# EAGLE board cg2 (EAGLE 4.11)
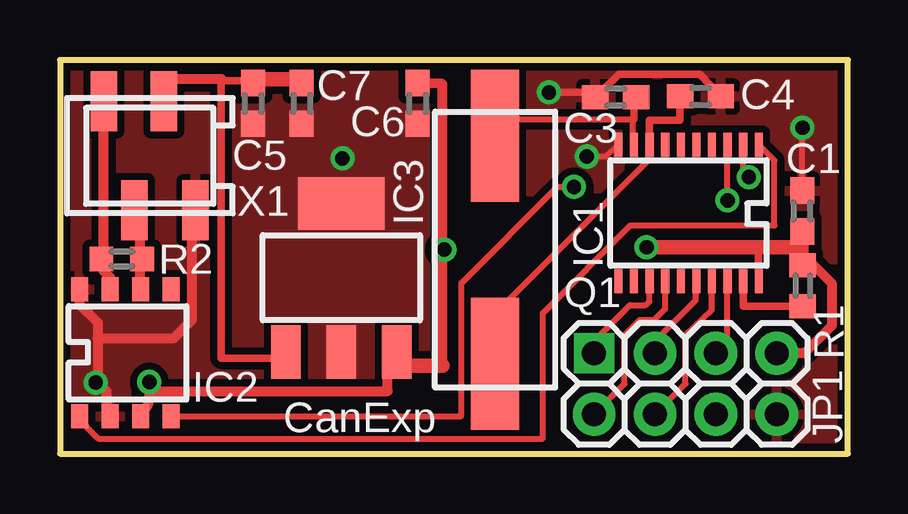
[diagram p0: board, top side]
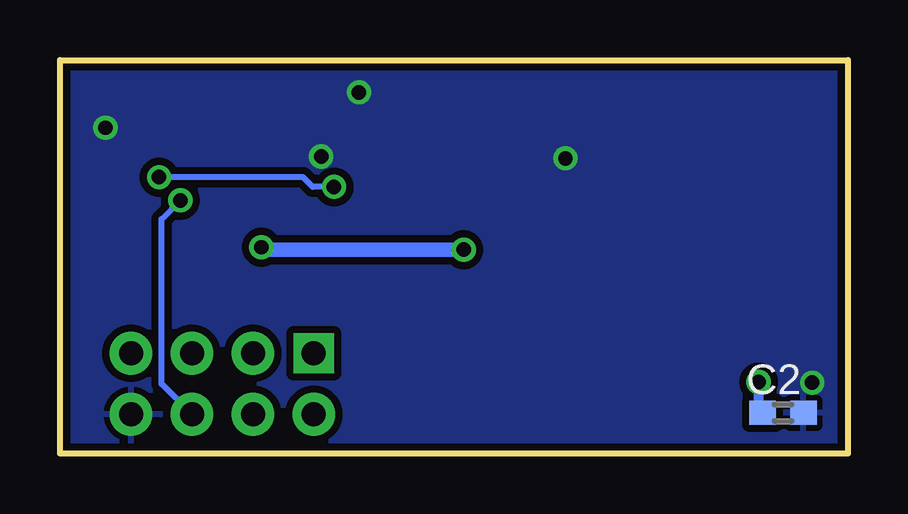
[diagram p1: board, bottom side, seen from below]

Size 32.85 x 16.4 mm. Coordinates in mm from the lower left corner, seen from the top.
Outline: 0,0 32.85,0 32.85,16.4 0,16.4 0,0
Copper layers (1*16): Top 0.035mm / dielectric 1.5mm / Bottom 0.035mm
Design rules "10mils, 0.6drill": minimum track width 10mil, minimum drill 0.6mm, track to track 10mil, track to pad 10mil, pad to pad 10mil, via to via 10mil, smd to smd 10mil, copper to edge 10mil, drill to drill 10mil, minimum pad ring 10mil, minimum via ring 8mil, stop-mask expansion 0mil, vias tented up to drill 0mil, thermal gap 10mil

## Footprints (pad centres in the part's own frame; a part is rotated, then mirrored left to right if it is on the bottom)
C0603 = smd 1.1 x 1: 1 -0.85,0; 2 0.85,0
TSSOP = smd 0.34 x 1: 1 -2.925,-2.85; 2 -2.275,-2.85; 3 -1.625,-2.85; 4 -0.975,-2.85; 5 -0.325,-2.85; 6 0.325,-2.85; 7 0.975,-2.85; 8 1.625,-2.85; 9 2.275,-2.85; 10 2.925,-2.85; 11 2.925,2.85; 12 2.275,2.85; 13 1.625,2.85; 14 0.975,2.85; 15 0.325,2.85; 16 -0.325,2.85; 17 -0.975,2.85; 18 -1.625,2.85; 19 -2.275,2.85; 20 -2.925,2.85
TSSOP' = smd 0.7 x 1: 1 -1.981,-2.645; 2 -0.711,-2.645; 3 0.559,-2.645; 4 1.829,-2.645; 5 1.829,2.645; 6 0.559,2.645; 7 -0.711,2.645; 8 -1.981,2.645
SOT223 = smd 1.219 x 2.235: 1 -2.311,-3.099; 2 0,-3.099; 3 2.311,-3.099 | smd 3.6 x 2.2: 4 0,3.099
2X04 = drill 1 pad 1.676 square: 1 -3.81,1.27 | drill 1 pad 1.778 round: 2 -3.81,-1.27; 3 -1.27,1.27; 4 -1.27,-1.27; 5 1.27,1.27; 6 1.27,-1.27; 7 3.81,1.27; 8 3.81,-1.27
SMD = smd 5.5 x 2: P$1 4.75,0; P$2 -4.75,0
R0603@1 = smd 1 x 1.1: 1 -0.85,0; 2 0.85,0
R0603 = smd 0.991 x 1.016: 1 -0.85,0; 2 0.85,0
MICROMATCH-4-SMD = smd 1.1 x 2.5: 1 1.905,-2.272; 2 0.585,2.272; 3 -0.635,-2.272; 4 -1.905,2.272

## Placement (x,y rotation side)
C1  100n  [C0603]  30.95,10.11 90 top
C2  100n  [C0603]  2.7,1.7 0 bottom
C3  16p  [C0603]  23.17,14.85 180 top
C4  16p  [C0603]  26.7,14.89 0 top
C5  0.22µ  [C0603]  8.04,14.59 270 top
C6  100n  [C0603]  14.9,14.59 270 top
C7  100n  [C0603]  10.07,14.59 270 top
IC1  MCP2515  [TSSOP]  26.21,10.02 180 top
IC2  MCP2551  [TSSOP']  2.8,4.2 0 top
IC3  LM340MP-5.0  [SOT223]  11.73,7.32 0 top
JP1  [2X04]  26.08,2.91 0 top
Q1  16/20MHz  [SMD]  18.14,8.5 270 top
R1  12k  [R0603@1]  30.97,6.99 270 top
R2  [R0603]  2.58,8.12 0 top
X1  MICROMATCH-4  [MICROMATCH-4-SMD]  3.75,12.41 0 top

## Library data of the parts
C1-C7 R1 R2 = rcl
IC1 = mcp2515
IC2 = mcp2551
IC3 = lm340mp
JP1 = pinhead-mm
Q1 = hc49-4h-smx
X1 = micromatch-smd

## Nets
CANH: IC2.7 R2.1 X1.4
CLK: IC1.3 JP1.6
CS: IC1.18 JP1.5
GND: C1.2 C2.2 C3.2 C4.2 C5.2 C6.2 C7.2 IC1.10 IC2.2 IC2.8 IC3.2 IC3.4 JP1.8 X1.1
INT: IC1.13 JP1.1
N$1: IC1.2 IC2.4
N$2: IC1.1 IC2.1
N$3: IC2.6 R2.2 X1.3
N$10: IC1.19 R1.2
N$12: C3.1 IC1.9 Q1.P$2
N$13: C4.1 IC1.8 Q1.P$1
SCK: IC1.14 JP1.2
SI: IC1.16 JP1.3
SO: IC1.17 JP1.4
VCC: C1.1 C2.1 C6.1 IC1.20 IC2.3 IC3.3 JP1.7 R1.1
VCC_ARNE: C5.1 C7.1 IC3.1 X1.2

## Tracks (layer width: path | path; a pad name or v marks a point on that pad's centre or on a via)
CANH
  Top 0.254: R2.1 1.82,8.12
  Top 0.406: IC2.7 2.07,6.86 2.07,7.35 1.82,7.61 1.82,8.12 1.82,14.15 X1.4
CLK  (via drill 0.6)
  Top 0.254: v27.83,10.55 27.83,12.38 IC1.3
  Bottom 0.254: v27.83,10.55 28.62,9.77 28.62,2.91 JP1.6
CS
  Top 0.254: IC1.18 27.83,4.66 JP1.5
GND  (via drill 0.6)
  Top 0.254: v21.96,12.38 22.77,12.38 IC1.10 | v30.95,13.58 30.95,11.44 C1.2 | 1.59,2.96 v1.49,2.96
  Top 0.305: IC2.2 1.95,1.99 | C4.2 26.67,15.81 23.29,15.81 C3.2 22.15,15.05 v20.39,15.05
  Top 0.406: 1.95,1.99 1.95,2.6 1.59,2.96 1.59,4.81 | 1.59,4.81 1.59,5.45 0.83,6.21 IC2.8 | X1.1 5.65,9.24 5.5,9 5.5,5.58 4.74,4.81 1.59,4.81 | 1.59,4.81 1.57,4.81
  Bottom 0.305: v20.39,15.05 20.34,15
  other vias: 11.78,12.3
  pour Bottom (isolate 0.305): -0.01,16.42 32.83,16.42 32.83,-0.03 24.38,-0.03 -0.01,-0.03
  pour Top (isolate 0.305, no thermals): 6.83,15.8 15.77,15.8 15.77,3.12 6.83,3.12
  pour Top (isolate 0.305): 0.04,16.5 33.06,16.5 33.06,-0.14 -0.21,-0.14 -0.21,16.5
INT
  Top 0.254: IC1.13 24.58,7.05 24.58,6.34 24.43,6.19 23.77,6.19 22.27,4.69 JP1.1
N$1  (via drill 0.6)
  Top 0.254: v21.43,11.11 20.74,11.11 16.73,7.1 16.73,1.56 4.94,1.56 IC2.4 | v28.72,11.52 28.49,11.75 IC1.2
  Bottom 0.254: v21.43,11.11 22.32,11.11 22.72,11.52 v28.72,11.52
N$2
  Top 0.254: IC2.1 1.13,1.08 1.59,0.62 20.13,0.62 20.13,5.85 23.79,9.51 29.79,9.51 29.79,12.22 IC1.1
N$3
  Top 0.254: 3.34,8.12 R2.2
  Top 0.406: IC2.6 3.34,6.86 3.34,8.12 3.34,9.14 X1.3 3.09,9.63
N$10
  Top 0.305: IC1.19 28.49,6.14 R1.2
N$12
  Top 0.254: 23.87,13.93 23.87,13.35 IC1.9 | 23.87,13.93 19.14,13.93 Q1.P$2 | 23.87,13.93 23.92,13.93
  Top 0.305: C3.1 23.92,14.63 23.92,13.93
N$13
  Top 0.254: IC1.8 24.53,12.38 24.53,12.23 18.25,5.96 Q1.P$1
  Top 0.305: IC1.8 24.58,13.88 25.85,13.88 C4.1
SCK
  Top 0.254: IC1.14 25.23,7.14 25.19,7.1 25.24,7.05 25.24,6.03 24.78,5.58 24.17,5.58 23.54,4.94 23.54,2.91 | JP1.2 23.54,2.91 | 23.54,2.91 23.55,2.92
SI
  Top 0.254: IC1.16 26.51,7.15 26.51,6.39 24.81,4.69 JP1.3
SO
  Top 0.254: IC1.17 27.18,7.11 27.17,7.1 27.17,5.98 26.08,4.94 26.08,2.91 | JP1.4 26.08,2.91 | 26.08,2.91 26.09,2.92
VCC  (via drill 0.6)
  Top 0.254: IC1.20 | 3.73,2.53 3.78,2.6
  Top 0.305: 13.66,3.37 IC3.3 | IC1.20 29.12,8.59 29.68,8.59
  Top 0.406: C6.1 15.95,15.41 15.95,8.5 | 15.95,3.66 15.95,8.5 | 14.08,3.66 14.08,4.48 IC3.3 | 3.78,2.6 13.66,2.6 13.66,3.37 | IC2.3 3.67,2.04 3.73,2.53 v3.73,2.98 | 15.95,8.5 v16.02,8.5 | 29.68,8.6 29.68,8.59 | 30.9,7.99 31.28,7.99 32.17,7.1 32.17,5.32 31.03,4.18 JP1.7
  Top 0.61: 14.08,3.66 15.95,3.66 | v24.45,8.6 29.68,8.6 | C1.1 30.9,9.26 30.9,8.59 | 29.68,8.59 30.9,8.59 | R1.1 30.9,7.84 30.9,7.99 30.9,8.59
  Bottom 0.254: C2.1 3.73,2.2
  Bottom 0.406: 3.73,2.2 v3.73,2.98 | 24.3,8.5 24.3,8.6 v24.45,8.6
  Bottom 0.61: v16.02,8.5 24.3,8.5
VCC_ARNE
  Top 0.305: 6.72,15.53 7.97,15.53 C5.1 | 6.72,15.53 6.72,15.61 | 6.72,15.53 6.72,3.98 9.44,3.98 9.44,4.23 IC3.1
  Top 0.406: X1.2 4.5,15.61 6.72,15.61
  Top 0.61: C7.1 9.95,15.61 8.55,15.61 C5.1

## Text on the board
tNames: CanExp